# Altium PCB Copy of PCB1.PcbDoc (part 2 of 3)
Units mil, origin at the board's own origin, x right, y up, seen from the top; angles counter-clockwise.
Board outline 2060 x 2060 mil, 4 copper layers (L1, L2, L3, L4), stack 61.583 mil thick; 50 components, 94 nets, 313 pads, 31 vias.
Unrouted connection lines stored in the file: 190.
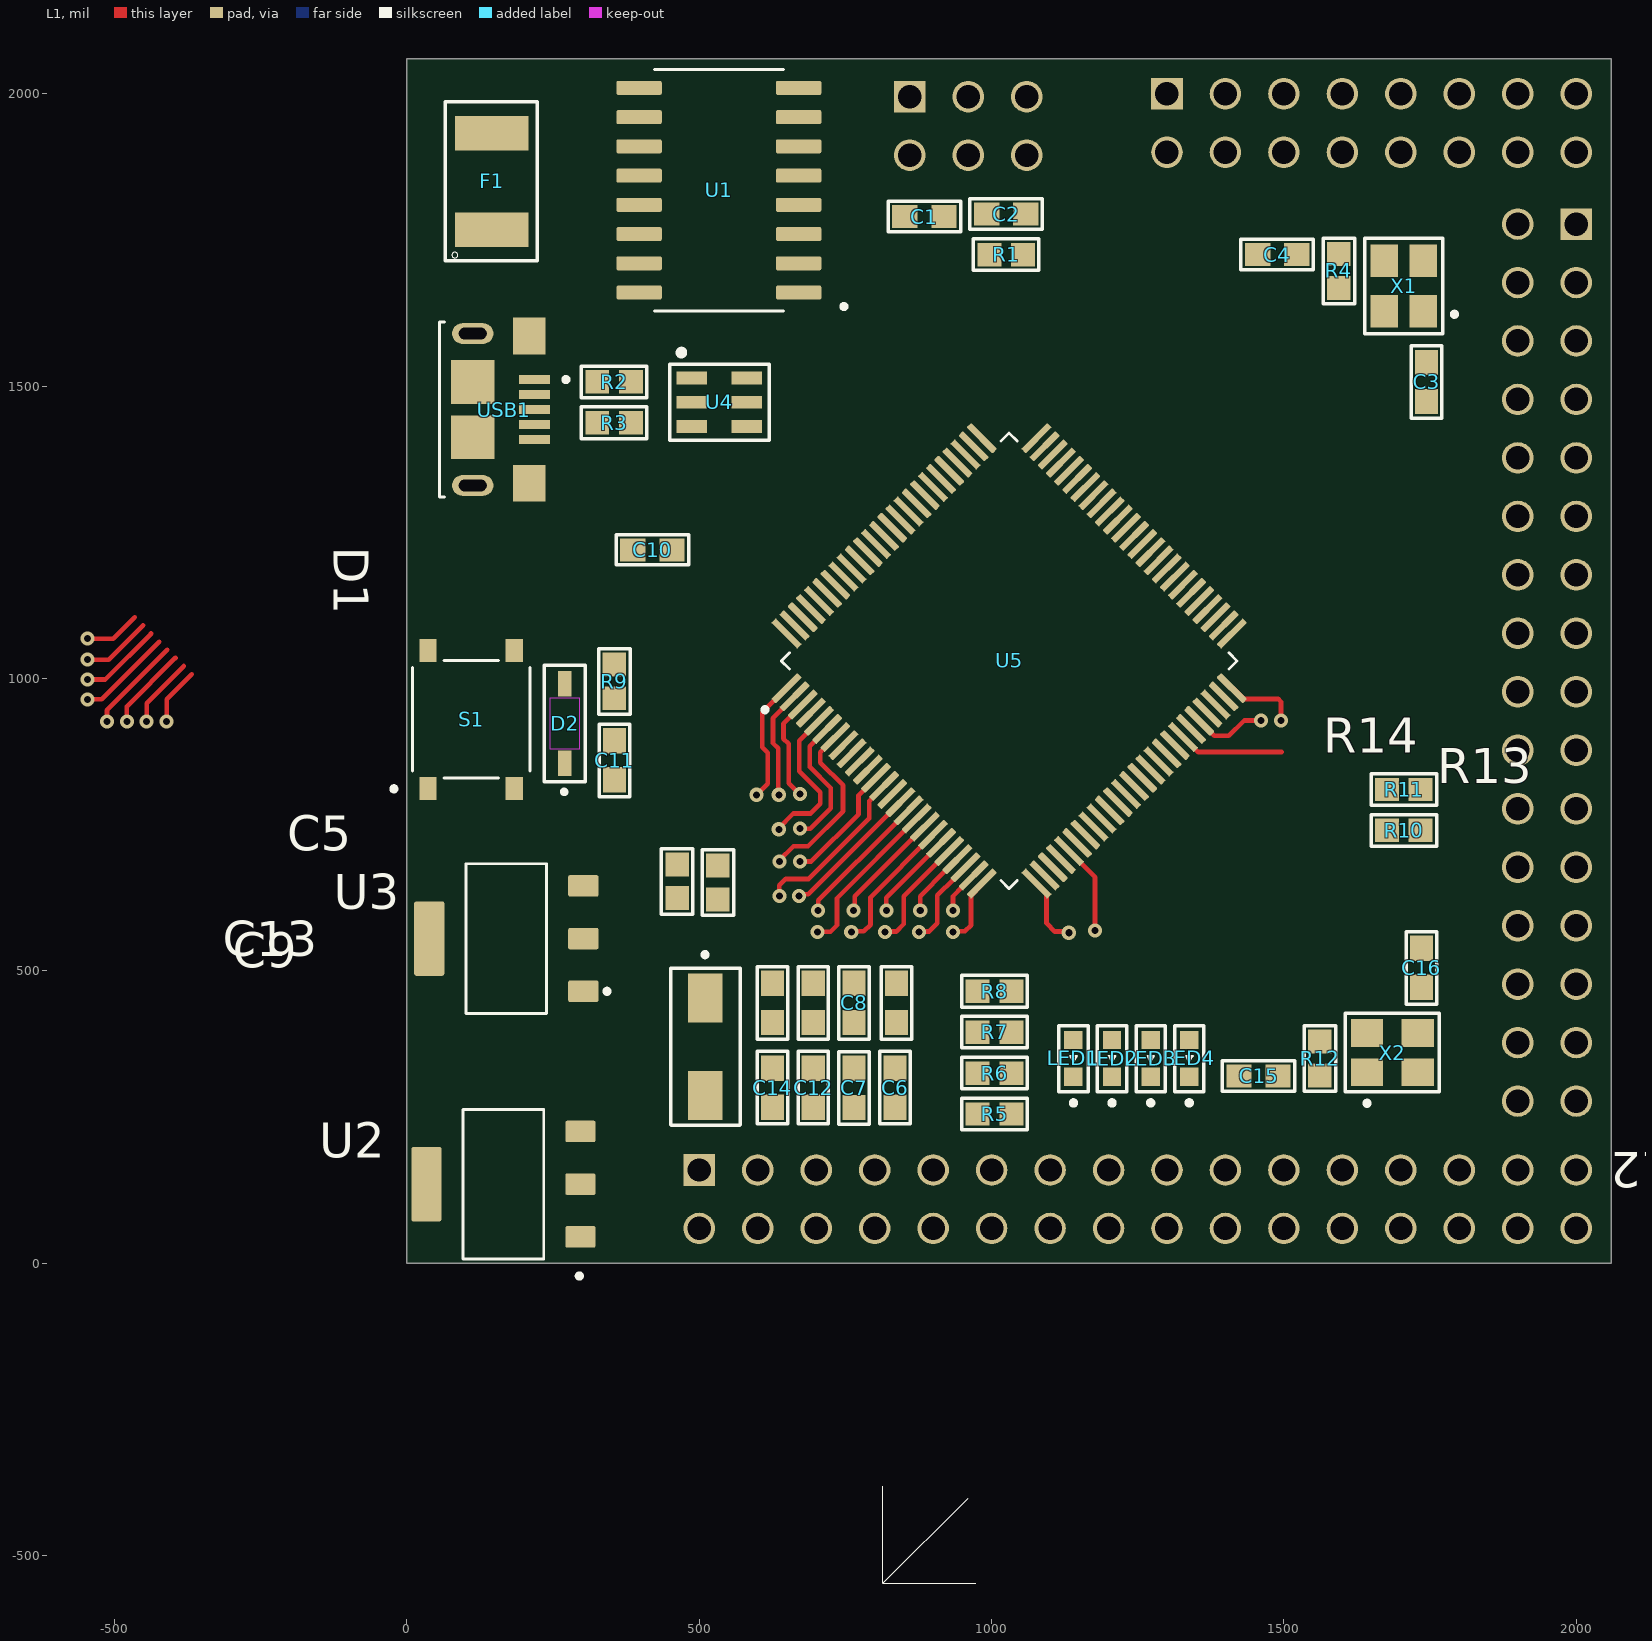
[diagram p0: L1 view]

## Part data (continued)
H1 H2: library part TSW-116-07-G-D, "Connector Header Through Hole 32 position 0.100\" (2.54mm)", Color=Black, Manufacturer=Samtec, Manufacturer Lifecycle Status=PRODUCTION, Max Current Rating=7.6A, Max Operating Temperature=125°C, Max Voltage Rating (AC)=550V, Min Operating Temperature=-55°C, Supplier Part Number=612-TSW-116-07-G-D-ND, Category="Power Connectors", ComponentLink1Description=https://datasheet.octopart.com:443/TSW-116-07-G-D-Samtec-datasheet-97325576.pdf?src-supplier=Sager+Electronics, ComponentLink1URL=https://datasheet.octopart.com:443/TSW-116-07-G-D-Samtec-datasheet-97325576.pdf?src-supplier=Sager+Electronics, ComponentLink2Description=https://datasheet.octopart.com:443/TSW-116-07-G-D-Samtec-datasheet-151455181.pdf?src-supplier=Sager+Electronics, ComponentLink2URL=https://datasheet.octopart.com:443/TSW-116-07-G-D-Samtec-datasheet-151455181.pdf?src-supplier=Sager+Electronics, ComponentLink3Description=https://sigma.octopart.com:443/97325577/technical_drawing/Samtec-TSW-116-07-G-D.pdf?src-supplier=Samtec, ComponentLink3URL=https://sigma.octopart.com:443/97325577/technical_drawing/Samtec-TSW-116-07-G-D.pdf?src-supplier=Samtec, ComponentLink4Description=https://datasheet.octopart.com:443/TSW-116-07-G-D-Samtec-datasheet-136646178.pdf?src-supplier=Master+Electronics, ComponentLink4URL=https://datasheet.octopart.com:443/TSW-116-07-G-D-Samtec-datasheet-136646178.pdf?src-supplier=Master+Electronics, ComponentLink5Description=https://datasheet.octopart.com:443/TSW-116-07-G-D-Samtec-datasheet-118235302.pdf?src-supplier=Electro+Sonic, ComponentLink5URL=https://datasheet.octopart.com:443/TSW-116-07-G-D-Samtec-datasheet-118235302.pdf?src-supplier=Electro+Sonic, ComponentLink6Description=https://datasheet.octopart.com:443/TSW-116-07-G-D-Samtec-datasheet-182948906.pdf?src-supplier=JRH+Electronics, ComponentLink6URL=https://datasheet.octopart.com:443/TSW-116-07-G-D-Samtec-datasheet-182948906.pdf?src-supplier=JRH+Electronics, ComponentLink7Description=https://datasheet.octopart.com:443/TSW-116-07-G-D-Samtec-datasheet-160657603.pdf?src-supplier=Toby+Electronics, ComponentLink7URL=https://datasheet.octopart.com:443/TSW-116-07-G-D-Samtec-datasheet-160657603.pdf?src-supplier=Toby+Electronics, ComponentLink8Description=https://datasheet.octopart.com:443/TSW-116-07-G-D-Samtec-datasheet-116539033.pdf?src-supplier=Toby+Electronics, ComponentLink8URL=https://datasheet.octopart.com:443/TSW-116-07-G-D-Samtec-datasheet-116539033.pdf?src-supplier=Toby+Electronics, ComponentLink9Description=https://datasheet.octopart.com:443/TSW-116-07-G-D-Samtec-datasheet-116536310.pdf?src-supplier=Toby+Electronics, ComponentLink9URL=https://datasheet.octopart.com:443/TSW-116-07-G-D-Samtec-datasheet-116536310.pdf?src-supplier=Toby+Electronics, ComponentLink10Description=https://datasheet.octopart.com:443/TSW-116-07-G-D-.-Samtec-datasheet-138830914.pdf?src-supplier=Newark, ComponentLink10URL=https://datasheet.octopart.com:443/TSW-116-07-G-D-.-Samtec-datasheet-138830914.pdf?src-supplier=Newark, ComponentLink11Description=https://datasheet.octopart.com:443/TSW-116-07-G-D-Samtec-datasheet-112220187.pdf?src-supplier=Newark, ComponentLink11URL=https://datasheet.octopart.com:443/TSW-116-07-G-D-Samtec-datasheet-112220187.pdf?src-supplier=Newark, ComponentLink12Description=https://datasheet.octopart.com:443/TSW-116-07-G-D-Samtec-datasheet-11047283.pdf?src-supplier=Newark, ComponentLink12URL=https://datasheet.octopart.com:443/TSW-116-07-G-D-Samtec-datasheet-11047283.pdf?src-supplier=Newark, ComponentLink13Description=https://datasheet.octopart.com/TSW-116-07-G-D-Samtec-datasheet-86818365.pdf, ComponentLink13URL=https://datasheet.octopart.com/TSW-116-07-G-D-Samtec-datasheet-86818365.pdf, ComponentLink14Description=https://datasheet.octopart.com:443/TSW-116-07-G-D-Samtec-datasheet-11542832.pdf?src-supplier=Arrow+Electronics, ComponentLink14URL=https://datasheet.octopart.com:443/TSW-116-07-G-D-Samtec-datasheet-11542832.pdf?src-supplier=Arrow+Electronics, Connector Type="Male Pin", Contact Material=Bronze, Contact Mating Length=5.842mm, Contact Plating=Gold, Depth=5.08mm, Gender=Male, Housing Color=Black, Housing Material=Polyester, Lead Free="Lead Free", Lead Pitch=2.54mm, Length=40.64mm, Lifecycle Status=Production, Manufacturer Part Number=TSW-116-07-G-D, Mounting Technology="Through Hole", Number of Contacts=32, Number of Positions=32, Number of Rows=2, Orientation=Straight, Pitch=2.54mm, Pricing="1=3.91, 10=3.318, 100=2.82, 500=2.51726, 1000=2.3972 (USD)", Radiation Hardening=No, REACH SVHC=Unaffected, RoHS=Compliant, Row Spacing=2.54mm, Stock=463, Supplier=DigiKey, Termination=Solder, Width=5.08mm
H3: library part TSW-108-07-G-D, "Connector Header Through Hole 16 position 0.100\" (2.54mm)", Color=Black, Manufacturer=Samtec, Manufacturer Lifecycle Status=PRODUCTION, Max Current Rating=7.6A, Max Operating Temperature=125°C, Max Voltage Rating (AC)=550V, Min Operating Temperature=-55°C, Supplier Part Number=612-TSW-108-07-G-D-ND, Category="Headers and Wire Housings", ComponentLink1Description=https://datasheet.octopart.com:443/TSW-108-07-G-D-Samtec-datasheet-97325576.pdf?src-supplier=Sager+Electronics, ComponentLink1URL=https://datasheet.octopart.com:443/TSW-108-07-G-D-Samtec-datasheet-97325576.pdf?src-supplier=Sager+Electronics, ComponentLink2Description=https://datasheet.octopart.com:443/TSW-108-07-G-D-Samtec-datasheet-151455181.pdf?src-supplier=Sager+Electronics, ComponentLink2URL=https://datasheet.octopart.com:443/TSW-108-07-G-D-Samtec-datasheet-151455181.pdf?src-supplier=Sager+Electronics, ComponentLink3Description=https://sigma.octopart.com:443/97325577/technical_drawing/Samtec-TSW-108-07-G-D.pdf?src-supplier=Samtec, ComponentLink3URL=https://sigma.octopart.com:443/97325577/technical_drawing/Samtec-TSW-108-07-G-D.pdf?src-supplier=Samtec, ComponentLink4Description=https://datasheet.octopart.com:443/TSW-108-07-G-D-Samtec-datasheet-63880566.pdf?src-supplier=Newark, ComponentLink4URL=https://datasheet.octopart.com:443/TSW-108-07-G-D-Samtec-datasheet-63880566.pdf?src-supplier=Newark, ComponentLink5Description=https://datasheet.octopart.com:443/TSW-108-07-G-D-Samtec-datasheet-11047283.pdf?src-supplier=Newark, ComponentLink5URL=https://datasheet.octopart.com:443/TSW-108-07-G-D-Samtec-datasheet-11047283.pdf?src-supplier=Newark, ComponentLink6Description=https://datasheet.octopart.com:443/TSW-108-07-G-D-Samtec-datasheet-136646178.pdf?src-supplier=Master+Electronics, ComponentLink6URL=https://datasheet.octopart.com:443/TSW-108-07-G-D-Samtec-datasheet-136646178.pdf?src-supplier=Master+Electronics, ComponentLink7Description=https://datasheet.octopart.com:443/TSW-108-07-G-D-Samtec-datasheet-116615235.pdf?src-supplier=Master+Electronics, ComponentLink7URL=https://datasheet.octopart.com:443/TSW-108-07-G-D-Samtec-datasheet-116615235.pdf?src-supplier=Master+Electronics, ComponentLink8Description=https://datasheet.octopart.com:443/TSW-108-07-G-D-Samtec-datasheet-62107121.pdf?src-supplier=Farnell, ComponentLink8URL=https://datasheet.octopart.com:443/TSW-108-07-G-D-Samtec-datasheet-62107121.pdf?src-supplier=Farnell, ComponentLink9Description=https://datasheet.octopart.com:443/TSW-108-07-G-D-Samtec-datasheet-182948906.pdf?src-supplier=JRH+Electronics, ComponentLink9URL=https://datasheet.octopart.com:443/TSW-108-07-G-D-Samtec-datasheet-182948906.pdf?src-supplier=JRH+Electronics, ComponentLink10Description=https://datasheet.octopart.com:443/TSW-108-07-G-D-Samtec-datasheet-160657603.pdf?src-supplier=Toby+Electronics, ComponentLink10URL=https://datasheet.octopart.com:443/TSW-108-07-G-D-Samtec-datasheet-160657603.pdf?src-supplier=Toby+Electronics, ComponentLink11Description=https://datasheet.octopart.com:443/TSW-108-07-G-D-Samtec-datasheet-116539033.pdf?src-supplier=Toby+Electronics, ComponentLink11URL=https://datasheet.octopart.com:443/TSW-108-07-G-D-Samtec-datasheet-116539033.pdf?src-supplier=Toby+Electronics, ComponentLink12Description=https://datasheet.octopart.com:443/TSW-108-07-G-D-Samtec-datasheet-116536310.pdf?src-supplier=Toby+Electronics, ComponentLink12URL=https://datasheet.octopart.com:443/TSW-108-07-G-D-Samtec-datasheet-116536310.pdf?src-supplier=Toby+Electronics, ComponentLink13Description=https://datasheet.octopart.com/TSW-108-07-G-D-Samtec-datasheet-86818365.pdf, ComponentLink13URL=https://datasheet.octopart.com/TSW-108-07-G-D-Samtec-datasheet-86818365.pdf, ComponentLink14Description=https://datasheet.octopart.com:443/TSW-108-07-G-D-Samtec-datasheet-5313500.pdf?src-supplier=_legacy+Avnet, ComponentLink14URL=https://datasheet.octopart.com:443/TSW-108-07-G-D-Samtec-datasheet-5313500.pdf?src-supplier=_legacy+Avnet, Connector Type="Male Pin", Contact Material=Bronze, Contact Mating Length=5.842mm, Contact Plating=Gold, Depth=5.08mm, Gender=Male, Housing Color=Black, Housing Material=Polyester, Lead Free="Lead Free", Lead Pitch=2.54mm, Lifecycle Status=Production, Manufacturer Part Number=TSW-108-07-G-D, Mounting Technology="Through Hole", Number of Contacts=16, Number of Positions=16, Number of Rows=2, Orientation=Straight, Packaging=Bulk, Pins=16, Pitch=2.54mm, Pricing="1=1.34, 10=1.135, 100=0.9644, 500=0.8608, 1000=0.8197, 5000=0.73175, 10000=0.7275 (USD)", Radiation Hardening=No, REACH SVHC=Unaffected, RoHS=Compliant, Row Spacing=2.54mm, Stock=1851, Supplier=DigiKey, Termination=Solder, Width=5.08mm
H4: library part TSW-103-07-G-D, "CONN HEADER VERT 6POS 2.54MM", Color=Black, Manufacturer=Samtec, Manufacturer Lifecycle Status=PRODUCTION, Max Current Rating=7.6A, Max Operating Temperature=125°C, Max Voltage Rating (AC)=550V, Min Operating Temperature=-55°C, Supplier Part Number=612-TSW-103-07-G-D-ND, Category="Headers and Wire Housings", ComponentLink1Description=https://datasheet.octopart.com:443/TSW-103-07-G-D-Samtec-datasheet-97325576.pdf?src-supplier=Newark, ComponentLink1URL=https://datasheet.octopart.com:443/TSW-103-07-G-D-Samtec-datasheet-97325576.pdf?src-supplier=Newark, ComponentLink2Description=https://sigma.octopart.com:443/97325577/technical_drawing/Samtec-TSW-103-07-G-D.pdf?src-supplier=HQonline, ComponentLink2URL=https://sigma.octopart.com:443/97325577/technical_drawing/Samtec-TSW-103-07-G-D.pdf?src-supplier=HQonline, ComponentLink3Description=https://datasheet.octopart.com:443/TSW-103-07-G-D-Samtec-datasheet-62107121.pdf?src-supplier=Farnell, ComponentLink3URL=https://datasheet.octopart.com:443/TSW-103-07-G-D-Samtec-datasheet-62107121.pdf?src-supplier=Farnell, ComponentLink4Description=https://datasheet.octopart.com:443/TSW-103-07-G-D-Samtec-datasheet-150856372.pdf?src-supplier=Electro+Sonic, ComponentLink4URL=https://datasheet.octopart.com:443/TSW-103-07-G-D-Samtec-datasheet-150856372.pdf?src-supplier=Electro+Sonic, ComponentLink5Description=https://datasheet.octopart.com:443/TSW-103-07-G-D-Samtec-datasheet-116615235.pdf?src-supplier=Electro+Sonic, ComponentLink5URL=https://datasheet.octopart.com:443/TSW-103-07-G-D-Samtec-datasheet-116615235.pdf?src-supplier=Electro+Sonic, ComponentLink6Description=https://datasheet.octopart.com:443/TSW-103-07-G-D-Samtec-datasheet-11047283.pdf?src-supplier=element14+APAC, ComponentLink6URL=https://datasheet.octopart.com:443/TSW-103-07-G-D-Samtec-datasheet-11047283.pdf?src-supplier=element14+APAC, ComponentLink7Description=https://datasheet.octopart.com:443/TSW-103-07-G-D-Samtec-datasheet-182948906.pdf?src-supplier=JRH+Electronics, ComponentLink7URL=https://datasheet.octopart.com:443/TSW-103-07-G-D-Samtec-datasheet-182948906.pdf?src-supplier=JRH+Electronics, ComponentLink8Description=https://datasheet.octopart.com:443/TSW-103-07-G-D-Samtec-datasheet-160657603.pdf?src-supplier=Toby+Electronics, ComponentLink8URL=https://datasheet.octopart.com:443/TSW-103-07-G-D-Samtec-datasheet-160657603.pdf?src-supplier=Toby+Electronics, ComponentLink9Description=https://datasheet.octopart.com:443/TSW-103-07-G-D-Samtec-datasheet-116539033.pdf?src-supplier=Toby+Electronics, ComponentLink9URL=https://datasheet.octopart.com:443/TSW-103-07-G-D-Samtec-datasheet-116539033.pdf?src-supplier=Toby+Electronics, ComponentLink10Description=https://datasheet.octopart.com:443/TSW-103-07-G-D-Samtec-datasheet-116536310.pdf?src-supplier=Toby+Electronics, ComponentLink10URL=https://datasheet.octopart.com:443/TSW-103-07-G-D-Samtec-datasheet-116536310.pdf?src-supplier=Toby+Electronics, ComponentLink11Description=https://datasheet.octopart.com:443/TSW-103-07-G-D-Samtec-datasheet-151455181.pdf?src-supplier=Sager+Electronics, ComponentLink11URL=https://datasheet.octopart.com:443/TSW-103-07-G-D-Samtec-datasheet-151455181.pdf?src-supplier=Sager+Electronics, ComponentLink12Description=https://datasheet.octopart.com/TSW-103-07-G-D-Samtec-datasheet-86818365.pdf, ComponentLink12URL=https://datasheet.octopart.com/TSW-103-07-G-D-Samtec-datasheet-86818365.pdf, ComponentLink13Description=https://datasheet.octopart.com:443/TSW-103-07-G-D-Samtec-datasheet-5313500.pdf?src-supplier=_legacy+Avnet, ComponentLink13URL=https://datasheet.octopart.com:443/TSW-103-07-G-D-Samtec-datasheet-5313500.pdf?src-supplier=_legacy+Avnet, Connector Type="Male Pin", Contact Material=Bronze, Contact Mating Length=5.842mm, Contact Plating=Gold, Depth=5.08mm, Gender=Male, Housing Color=Black, Housing Material=Polyester, Lead Free="Lead Free", Lead Pitch=2.54mm, Lifecycle Status=Production, Manufacturer Part Number=TSW-103-07-G-D, Mounting Technology="Through Hole", Number of Contacts=6, Number of Positions=6, Number of Rows=2, Orientation=Straight, Packaging=Bulk, Pins=6, Pitch=2.54mm, Pricing="1=0.58, 10=0.495, 100=0.4209, 500=0.37568, 1000=0.35773, 5000=0.31932, 10000=0.30409 (USD)", Radiation Hardening=No, REACH SVHC=Unaffected, RoHS=Compliant, Row Spacing=2.54mm, Stock=10228, Supplier=DigiKey, Termination=Solder, Width=5.08mm
LED1: library part 150060VS75000, "LED GREEN CLEAR 0603 SMD", Case Code (Imperial)=0603, Case Code (Metric)=1608, Color=Green, Forward Current=100mA, Forward Voltage=2V, Manufacturer="Wurth Elektronik", Manufacturer Lifecycle Status=ACTIVE, Max Junction Temperature (Tj)=95°C, Max Operating Temperature=85°C, Max Reverse Voltage (DC)=5V, Min Operating Temperature=-40°C, Power Dissipation=72mW, Supplier Part Number=732-4980-1-ND, Test Current=20mA, Case/Package=0603, Category=LEDs, ComponentLink1Description=https://datasheet.octopart.com:443/150060VS75000-W%C3%BCrth-Elektronik-datasheet-141404641.pdf?src-supplier=Upverter, ComponentLink1URL=https://datasheet.octopart.com:443/150060VS75000-W%C3%BCrth-Elektronik-datasheet-141404641.pdf?src-supplier=Upverter, ComponentLink2Description=https://datasheet.octopart.com:443/150060VS75000-W%C3%BCrth-Elektronik-datasheet-15983789.pdf?src-supplier=Upverter, ComponentLink2URL=https://datasheet.octopart.com:443/150060VS75000-W%C3%BCrth-Elektronik-datasheet-15983789.pdf?src-supplier=Upverter, ComponentLink3Description=https://datasheet.octopart.com:443/150060VS75000-W%C3%BCrth-Elektronik-datasheet-141916710.pdf?src-supplier=Newark, ComponentLink3URL=https://datasheet.octopart.com:443/150060VS75000-W%C3%BCrth-Elektronik-datasheet-141916710.pdf?src-supplier=Newark, ComponentLink4Description=https://datasheet.octopart.com:443/150060VS75000-W%C3%BCrth-Elektronik-datasheet-41196440.pdf?src-supplier=Newark, ComponentLink4URL=https://datasheet.octopart.com:443/150060VS75000-W%C3%BCrth-Elektronik-datasheet-41196440.pdf?src-supplier=Newark, Dominant Wavelength=570nm, Height=700µm, Length=1.6mm, Lens Style="Clear, Rectangular", Lifecycle Status=Production, Luminous Intensity=40mcd, Manufacturer Part Number=150060VS75000, Mounting Technology="Surface Mount", Packaging="Tape and Reel", Peak Wavelength=572nm, Pins=2, Pricing="1=0.15, 50=0.142, 100=0.1239 (USD)", REACH SVHC=Unknown, Reverse Voltage=5V, RoHS=Compliant, Stock=627050, Supplier=DigiKey, Viewing Angle=140°, Wavelength=570nm, Width=800µm, YEOL="1 = Estimated lifetime > 10 years"
LED2: library part 150060YS75000, "LED YELLOW CLEAR 0603 SMD", Case Code (Imperial)=0603, Case Code (Metric)=1608, Color=Yellow, Forward Current=100mA, Forward Voltage=2V, Manufacturer="Wurth Elektronik", Manufacturer Lifecycle Status=ACTIVE, Max Junction Temperature (Tj)=95°C, Max Operating Temperature=85°C, Max Reverse Voltage (DC)=5V, Min Operating Temperature=-40°C, Power Dissipation=72mW, Supplier Part Number=732-4981-1-ND, Test Current=20mA, Case/Package=0603, Category=LEDs, ComponentLink1Description=https://datasheet.octopart.com:443/150060YS75000-W%C3%BCrth-Elektronik-datasheet-140603452.pdf?src-supplier=Newark, ComponentLink1URL=https://datasheet.octopart.com:443/150060YS75000-W%C3%BCrth-Elektronik-datasheet-140603452.pdf?src-supplier=Newark, ComponentLink2Description=https://datasheet.octopart.com:443/150060YS75000-W%C3%BCrth-Elektronik-datasheet-41196441.pdf?src-supplier=Newark, ComponentLink2URL=https://datasheet.octopart.com:443/150060YS75000-W%C3%BCrth-Elektronik-datasheet-41196441.pdf?src-supplier=Newark, ComponentLink3Description=https://datasheet.octopart.com:443/150060YS75000-W%C3%BCrth-Elektronik-datasheet-15976795.pdf?src-supplier=Upverter, ComponentLink3URL=https://datasheet.octopart.com:443/150060YS75000-W%C3%BCrth-Elektronik-datasheet-15976795.pdf?src-supplier=Upverter, Dominant Wavelength=590nm, Height=700µm, Length=1.6mm, Lens Style="Clear, Rectangular", Lifecycle Status=Production, Luminous Intensity=120mcd, Manufacturer Part Number=150060YS75000, Mounting Technology="Surface Mount", Packaging="Tape and Reel", Peak Wavelength=595nm, Pricing="1=0.15, 50=0.142, 100=0.1239 (USD)", REACH SVHC=Unknown, Reverse Voltage=5V, RoHS=Compliant, Stock=129880, Supplier=DigiKey, Viewing Angle=140°, Wavelength=590nm, Width=800µm, YEOL="1 = Estimated lifetime > 10 years"
LED3: library part 150060RS75000, "LED RED CLEAR 0603 SMD", Case Code (Imperial)=0603, Case Code (Metric)=1608, Color=Red, Forward Current=100mA, Forward Voltage=2V, Manufacturer="Wurth Elektronik", Manufacturer Lifecycle Status=ACTIVE, Max Junction Temperature (Tj)=95°C, Max Operating Temperature=85°C, Max Reverse Voltage (DC)=5V, Min Operating Temperature=-40°C, Power Dissipation=72mW, Supplier Part Number=732-4978-6-ND, Test Current=20mA, Case/Package=0603, Category=LEDs, ComponentLink1Description=https://datasheet.octopart.com:443/150060RS75000-W%C3%BCrth-Elektronik-datasheet-141913886.pdf?src-supplier=Upverter, ComponentLink1URL=https://datasheet.octopart.com:443/150060RS75000-W%C3%BCrth-Elektronik-datasheet-141913886.pdf?src-supplier=Upverter, ComponentLink2Description=https://datasheet.octopart.com:443/150060RS75000-W%C3%BCrth-Elektronik-datasheet-15983787.pdf?src-supplier=Upverter, ComponentLink2URL=https://datasheet.octopart.com:443/150060RS75000-W%C3%BCrth-Elektronik-datasheet-15983787.pdf?src-supplier=Upverter, ComponentLink3Description=https://datasheet.octopart.com:443/150060RS75000-W%C3%BCrth-Elektronik-datasheet-140603451.pdf?src-supplier=Wurth+Elektronik, ComponentLink3URL=https://datasheet.octopart.com:443/150060RS75000-W%C3%BCrth-Elektronik-datasheet-140603451.pdf?src-supplier=Wurth+Elektronik, ComponentLink4Description=https://datasheet.octopart.com:443/150060RS75000-W%C3%BCrth-Elektronik-datasheet-41196438.pdf?src-supplier=Newark, ComponentLink4URL=https://datasheet.octopart.com:443/150060RS75000-W%C3%BCrth-Elektronik-datasheet-41196438.pdf?src-supplier=Newark, Dominant Wavelength=625nm, Height=700µm, Length=1.6mm, Lens Style="Clear, Rectangular", Lifecycle Status=Production, Luminous Intensity=250mcd, Manufacturer Part Number=150060RS75000, Mounting Technology="Surface Mount", Packaging="Tape and Reel", Peak Wavelength=630nm, Pricing="1=0.15, 50=0.142, 100=0.1239 (USD)", REACH SVHC=Unknown, Reverse Voltage=5V, RoHS=Compliant, Stock=386931, Supplier=DigiKey, Viewing Angle=140°, Wavelength=625nm, Width=800µm, YEOL="1 = Estimated lifetime > 10 years"
LED4: library part 150060BS75000, "LED BLUE CLEAR 0603 SMD", Case Code (Imperial)=0603, Case Code (Metric)=1608, Color=Blue, Forward Current=100mA, Forward Voltage=3.2V, Manufacturer="Wurth Elektronik", Manufacturer Lifecycle Status=ACTIVE, Max Junction Temperature (Tj)=95°C, Max Operating Temperature=85°C, Max Reverse Voltage (DC)=5V, Min Operating Temperature=-40°C, Power Dissipation=105mW, Supplier Part Number=732-4966-6-ND, Test Current=20mA, Case/Package=0603, Category=LEDs, ComponentLink1Description=https://datasheet.octopart.com:443/150060BS75000-W%C3%BCrth-Elektronik-datasheet-140583947.pdf?src-supplier=Newark, ComponentLink1URL=https://datasheet.octopart.com:443/150060BS75000-W%C3%BCrth-Elektronik-datasheet-140583947.pdf?src-supplier=Newark, ComponentLink2Description=https://datasheet.octopart.com:443/150060BS75000-W%C3%BCrth-Elektronik-datasheet-41196436.pdf?src-supplier=Newark, ComponentLink2URL=https://datasheet.octopart.com:443/150060BS75000-W%C3%BCrth-Elektronik-datasheet-41196436.pdf?src-supplier=Newark, ComponentLink3Description=https://datasheet.octopart.com:443/150060BS75000-W%C3%BCrth-Elektronik-datasheet-15983786.pdf?src-supplier=Upverter, ComponentLink3URL=https://datasheet.octopart.com:443/150060BS75000-W%C3%BCrth-Elektronik-datasheet-15983786.pdf?src-supplier=Upverter, Dominant Wavelength=470nm, Height=700µm, Length=1.6mm, Lens Style="Clear, Rectangular", Lifecycle Status=Production, Luminous Intensity=145mcd, Manufacturer Part Number=150060BS75000, Mounting Technology="Surface Mount", Packaging="Tape and Reel", Peak Wavelength=465nm, Pricing="1=0.16, 50=0.155, 100=0.1346 (USD)", REACH SVHC=Unknown, Reverse Voltage=5V, RoHS=Compliant, Stock=157758, Supplier=DigiKey, Viewing Angle=140°, Wavelength=470nm, Width=800µm, YEOL="1 = Estimated lifetime > 10 years"
R1 R9 R10 R11: library part RC0603FR-0710KL, "RES 10K OHM 1% 1/10W 0603", Case Code (Imperial)=0603, Manufacturer 1="Yageo Group", Max Operating Temperature=155°C, Min Operating Temperature=-55°C, Power Rating=100mW, Supplier Part Number 1=311-10.0KHRDKR-ND, Temperature Coefficient=100ppm/°C, Tolerance=1%, Voltage Rating=75V, Voltage Rating (DC)=50V, Case Code (Metric)=0603, Case/Package=0603, China RoHS=Non-Compliant, ComponentLink1Description=https://datasheet.octopart.com:443/RC0603FR-0710KL-Yageo-datasheet-175887523.pdf?src-supplier=IHS, ComponentLink1URL=https://datasheet.octopart.com:443/RC0603FR-0710KL-Yageo-datasheet-175887523.pdf?src-supplier=IHS, ComponentLink2Description=https://datasheet.octopart.com:443/RC0603FR-0710KL-Yageo-datasheet-103092701.pdf?src-supplier=Upverter, ComponentLink2URL=https://datasheet.octopart.com:443/RC0603FR-0710KL-Yageo-datasheet-103092701.pdf?src-supplier=Upverter, ComponentLink3Description=https://datasheet.octopart.com:443/RC0603FR-0710KL-Yageo-datasheet-98239111.pdf?src-supplier=Upverter, ComponentLink3URL=https://datasheet.octopart.com:443/RC0603FR-0710KL-Yageo-datasheet-98239111.pdf?src-supplier=Upverter, ComponentLink4Description=https://datasheet.octopart.com:443/RC0603FR-0710KL-Yageo-datasheet-141265859.pdf?src-supplier=Upverter, ComponentLink4URL=https://datasheet.octopart.com:443/RC0603FR-0710KL-Yageo-datasheet-141265859.pdf?src-supplier=Upverter, ComponentLink5Description=https://sigma.octopart.com:443/138820526/technical_drawing/Yageo-RC0603FR-0710KL.pdf?src-supplier=Upverter, ComponentLink5URL=https://sigma.octopart.com:443/138820526/technical_drawing/Yageo-RC0603FR-0710KL.pdf?src-supplier=Upverter, ComponentLink6Description=https://datasheet.octopart.com:443/RC0603FR-0710KL-Yageo-datasheet-8328172.pdf?src-supplier=Farnell, ComponentLink6URL=https://datasheet.octopart.com:443/RC0603FR-0710KL-Yageo-datasheet-8328172.pdf?src-supplier=Farnell, ComponentLink7Description=https://datasheet.octopart.com:443/RC0603FR-0710KL-Yageo-datasheet-13691069.pdf?src-supplier=Farnell, ComponentLink7URL=https://datasheet.octopart.com:443/RC0603FR-0710KL-Yageo-datasheet-13691069.pdf?src-supplier=Farnell, ComponentLink8Description=https://datasheet.octopart.com:443/RC0603FR-0710KL-Yageo-datasheet-62067350.pdf?src-supplier=element14+APAC, ComponentLink8URL=https://datasheet.octopart.com:443/RC0603FR-0710KL-Yageo-datasheet-62067350.pdf?src-supplier=element14+APAC, ComponentLink9Description=https://datasheet.octopart.com:443/RC0603FR-0710KL-Yageo-datasheet-17842380.pdf?src-supplier=element14+APAC, ComponentLink9URL=https://datasheet.octopart.com:443/RC0603FR-0710KL-Yageo-datasheet-17842380.pdf?src-supplier=element14+APAC, ComponentLink10Description=https://datasheet.octopart.com:443/RC0603FR-0710KL-Yageo-datasheet-15599030.pdf?src-supplier=Future+Electronics, ComponentLink10URL=https://datasheet.octopart.com:443/RC0603FR-0710KL-Yageo-datasheet-15599030.pdf?src-supplier=Future+Electronics, ComponentLink11Description=https://datasheet.octopart.com:443/RC0603FR-0710KL-Yageo-Group-datasheet-176638170.pdf?src-supplier=Future+Electronics, ComponentLink11URL=https://datasheet.octopart.com:443/RC0603FR-0710KL-Yageo-Group-datasheet-176638170.pdf?src-supplier=Future+Electronics, ComponentLink12Description=https://datasheet.octopart.com:443/RC0603FR-0710KL-Yageo-datasheet-164759695.pdf?src-supplier=Future+Electronics, ComponentLink12URL=https://datasheet.octopart.com:443/RC0603FR-0710KL-Yageo-datasheet-164759695.pdf?src-supplier=Future+Electronics, ComponentLink13Description=https://datasheet.octopart.com:443/RC0603FR-0710KL-Yageo-datasheet-127823281.pdf?src-supplier=Future+Electronics, ComponentLink13URL=https://datasheet.octopart.com:443/RC0603FR-0710KL-Yageo-datasheet-127823281.pdf?src-supplier=Future+Electronics, ComponentLink14Description=https://datasheet.octopart.com:443/RC0603FR-0710KL-Yageo-datasheet-137700087.pdf?src-supplier=Future+Electronics, ComponentLink14URL=https://datasheet.octopart.com:443/RC0603FR-0710KL-Yageo-datasheet-137700087.pdf?src-supplier=Future+Electronics, ComponentLink15Description=https://datasheet.octopart.com:443/RC0603FR-0710KL-Yageo-datasheet-27584510.pdf?src-supplier=Future+Electronics, ComponentLink15URL=https://datasheet.octopart.com:443/RC0603FR-0710KL-Yageo-datasheet-27584510.pdf?src-supplier=Future+Electronics, ComponentLink16Description=https://datasheet.octopart.com:443/RC0603FR-0710KL-Yageo-datasheet-8324193.pdf?src-supplier=Future+Electronics, ComponentLink16URL=https://datasheet.octopart.com:443/RC0603FR-0710KL-Yageo-datasheet-8324193.pdf?src-supplier=Future+Electronics, ComponentLink17Description=https://datasheet.octopart.com:443/RC0603FR-0710KL-Yageo-datasheet-12596169.pdf?src-supplier=Newark, ComponentLink17URL=https://datasheet.octopart.com:443/RC0603FR-0710KL-Yageo-datasheet-12596169.pdf?src-supplier=Newark, ComponentLink18Description=https://datasheet.octopart.com:443/RC0603FR-0710KL-Yageo-datasheet-503470.pdf?src-supplier=Newark, ComponentLink18URL=https://datasheet.octopart.com:443/RC0603FR-0710KL-Yageo-datasheet-503470.pdf?src-supplier=Newark, ComponentLink19Description=https://datasheet.octopart.com:443/RC0603FR-0710KL-Yageo-datasheet-34211833.pdf?src-supplier=Newark, ComponentLink19URL=https://datasheet.octopart.com:443/RC0603FR-0710KL-Yageo-datasheet-34211833.pdf?src-supplier=Newark, ComponentLink20Description=https://datasheet.octopart.com:443/RC0603FR-0710KL-Yageo-Group-datasheet-189192902.pdf?src-supplier=LCSC, ComponentLink20URL=https://datasheet.octopart.com:443/RC0603FR-0710KL-Yageo-Group-datasheet-189192902.pdf?src-supplier=LCSC, ComponentLink21Description=https://datasheet.octopart.com:443/RC0603FR-0710KL-Yageo-datasheet-79472498.pdf?src-supplier=Megastar, ComponentLink21URL=https://datasheet.octopart.com:443/RC0603FR-0710KL-Yageo-datasheet-79472498.pdf?src-supplier=Megastar, ComponentLink22Description=https://datasheet.octopart.com/RC0603FR-0710KL-Yageo-datasheet-73766026.pdf, ComponentLink22URL=https://datasheet.octopart.com/RC0603FR-0710KL-Yageo-datasheet-73766026.pdf, ComponentLink23Description=https://datasheet.octopart.com:443/RC0603FR-0710KL-Yageo-datasheet-118562.pdf?src-supplier=DigiKey, ComponentLink23URL=https://datasheet.octopart.com:443/RC0603FR-0710KL-Yageo-datasheet-118562.pdf?src-supplier=DigiKey, ComponentLink24Description=http://sigma.octopart.com:80/conflict_mineral_statement/Yageo-company-3.pdf?src-supplier=Compliance+Statements, ComponentLink24URL=http://sigma.octopart.com:80/conflict_mineral_statement/Yageo-company-3.pdf?src-supplier=Compliance+Statements, ComponentLink25Description=http://sigma.octopart.com:80/rohs_statement/Yageo-company-2.pdf?src-supplier=Compliance+Statements, ComponentLink25URL=http://sigma.octopart.com:80/rohs_statement/Yageo-company-2.pdf?src-supplier=Compliance+Statements, Composition="Thick Film", Contact Plating=Tin, Depth=800µm, Height=450µm, Lead Free="Lead Free", Lead Pitch=300µm, Length=1.6mm, Lifecycle Status=Production, Manufacturer Part Number 1=RC0603FR-0710KL, Military Standard=Not, Mounting Technology="Surface Mount", Number of Terminals=2, Packaging="Tape & Reel", Pins=2, Pricing 1="1=0.1, 10=0.025, 25=0.0188, 50=0.015, 100=0.0122, 250=0.0094, 500=0.00782, 1000=0.00661 (USD)", Radiation Hardening=No, REACH SVHC=Unaffected, RoHS=Compliant, Schedule B="8533210045, 8533210045|8533210045|8533210045|8533210045|8533210045|8533210045|8533210045|8533210045|8533210045|8533210045|8533210045|8533210045|8533210045|8533210045|8533210045|8533210045|8533210045|8533210045|8533210045|8533210045|8533210045|8533210045|8533210045|85", Stock 1=2515430, Supplier 1=DigiKey, Termination=SMD/SMT, Weight=2.012816mg, Width=800µm, Working Voltage=75V
R2 R3: library part RC0603FR-0722RL, "RES 22 OHM 1% 1/10W 0603", Case Code (Imperial)=0603, Manufacturer="Yageo Group", Max Operating Temperature=155°C, Max Output current=8A, Max Power Dissipation=100mW, Min Input Voltage=1.4V, Min Operating Temperature=-55°C, Supplier Part Number=311-22.0HRCT-ND, Temperature Coefficient=100ppm/°C, Tolerance=1%, Voltage Rating=75V, Voltage Rating (AC)=50V, Case Code (Metric)=0603, Case/Package=0603, Category="Chip SMD Resistors", China RoHS=Non-Compliant, ComponentLink1Description=https://datasheet.octopart.com:443/RC0603FR-0722RL-Yageo-datasheet-175887523.pdf?src-supplier=IHS, ComponentLink1URL=https://datasheet.octopart.com:443/RC0603FR-0722RL-Yageo-datasheet-175887523.pdf?src-supplier=IHS, ComponentLink2Description=https://datasheet.octopart.com:443/RC0603FR-0722RL-Yageo-datasheet-62067350.pdf?src-supplier=element14+APAC, ComponentLink2URL=https://datasheet.octopart.com:443/RC0603FR-0722RL-Yageo-datasheet-62067350.pdf?src-supplier=element14+APAC, ComponentLink3Description=https://datasheet.octopart.com:443/RC0603FR-0722RL-Yageo-datasheet-8328172.pdf?src-supplier=element14+APAC, ComponentLink3URL=https://datasheet.octopart.com:443/RC0603FR-0722RL-Yageo-datasheet-8328172.pdf?src-supplier=element14+APAC, ComponentLink4Description=https://datasheet.octopart.com:443/RC0603FR-0722RL-Yageo-datasheet-103092701.pdf?src-supplier=Upverter, ComponentLink4URL=https://datasheet.octopart.com:443/RC0603FR-0722RL-Yageo-datasheet-103092701.pdf?src-supplier=Upverter, ComponentLink5Description=https://datasheet.octopart.com:443/RC0603FR-0722RL-Yageo-datasheet-98239111.pdf?src-supplier=Upverter, ComponentLink5URL=https://datasheet.octopart.com:443/RC0603FR-0722RL-Yageo-datasheet-98239111.pdf?src-supplier=Upverter, ComponentLink6Description=https://datasheet.octopart.com:443/RC0603FR-0722RL-Yageo-Group-datasheet-190305687.pdf?src-supplier=Newark, ComponentLink6URL=https://datasheet.octopart.com:443/RC0603FR-0722RL-Yageo-Group-datasheet-190305687.pdf?src-supplier=Newark, ComponentLink7Description=https://datasheet.octopart.com:443/RC0603FR-0722RL-Yageo-datasheet-12596169.pdf?src-supplier=Newark, ComponentLink7URL=https://datasheet.octopart.com:443/RC0603FR-0722RL-Yageo-datasheet-12596169.pdf?src-supplier=Newark, ComponentLink8Description=https://datasheet.octopart.com:443/RC0603FR-0722RL-Yageo-datasheet-34211833.pdf?src-supplier=Newark, ComponentLink8URL=https://datasheet.octopart.com:443/RC0603FR-0722RL-Yageo-datasheet-34211833.pdf?src-supplier=Newark, ComponentLink9Description=https://datasheet.octopart.com:443/RC0603FR-0722RL-Yageo-Group-datasheet-189192902.pdf?src-supplier=LCSC, ComponentLink9URL=https://datasheet.octopart.com:443/RC0603FR-0722RL-Yageo-Group-datasheet-189192902.pdf?src-supplier=LCSC, ComponentLink10Description=https://datasheet.octopart.com:443/RC0603FR-0722RL-Yageo-Group-datasheet-176638170.pdf?src-supplier=Future+Electronics, ComponentLink10URL=https://datasheet.octopart.com:443/RC0603FR-0722RL-Yageo-Group-datasheet-176638170.pdf?src-supplier=Future+Electronics, ComponentLink11Description=https://datasheet.octopart.com:443/RC0603FR-0722RL-Yageo-datasheet-164759695.pdf?src-supplier=Future+Electronics, ComponentLink11URL=https://datasheet.octopart.com:443/RC0603FR-0722RL-Yageo-datasheet-164759695.pdf?src-supplier=Future+Electronics, ComponentLink12Description=https://datasheet.octopart.com:443/RC0603FR-0722RL-Yageo-datasheet-127823281.pdf?src-supplier=Future+Electronics, ComponentLink12URL=https://datasheet.octopart.com:443/RC0603FR-0722RL-Yageo-datasheet-127823281.pdf?src-supplier=Future+Electronics, ComponentLink13Description=https://datasheet.octopart.com:443/RC0603FR-0722RL-Yageo-datasheet-137700087.pdf?src-supplier=Future+Electronics, ComponentLink13URL=https://datasheet.octopart.com:443/RC0603FR-0722RL-Yageo-datasheet-137700087.pdf?src-supplier=Future+Electronics, ComponentLink14Description=https://datasheet.octopart.com:443/RC0603FR-0722RL-Yageo-datasheet-68297981.pdf?src-supplier=Future+Electronics, ComponentLink14URL=https://datasheet.octopart.com:443/RC0603FR-0722RL-Yageo-datasheet-68297981.pdf?src-supplier=Future+Electronics, ComponentLink15Description=https://datasheet.octopart.com:443/RC0603FR-0722RL-Yageo-datasheet-27584510.pdf?src-supplier=Future+Electronics, ComponentLink15URL=https://datasheet.octopart.com:443/RC0603FR-0722RL-Yageo-datasheet-27584510.pdf?src-supplier=Future+Electronics, ComponentLink16Description=https://datasheet.octopart.com:443/RC0603FR-0722RL-Yageo-datasheet-15599030.pdf?src-supplier=Future+Electronics, ComponentLink16URL=https://datasheet.octopart.com:443/RC0603FR-0722RL-Yageo-datasheet-15599030.pdf?src-supplier=Future+Electronics, ComponentLink17Description=https://datasheet.octopart.com:443/RC0603FR-0722RL-Yageo-datasheet-8324193.pdf?src-supplier=Future+Electronics, ComponentLink17URL=https://datasheet.octopart.com:443/RC0603FR-0722RL-Yageo-datasheet-8324193.pdf?src-supplier=Future+Electronics, ComponentLink18Description=https://datasheet.octopart.com:443/RC0603FR-0722RL-Yageo-datasheet-148775077.pdf?src-supplier=TME, ComponentLink18URL=https://datasheet.octopart.com:443/RC0603FR-0722RL-Yageo-datasheet-148775077.pdf?src-supplier=TME, ComponentLink19Description=https://datasheet.octopart.com/RC0603FR-0722RL-Yageo-datasheet-73766026.pdf, ComponentLink19URL=https://datasheet.octopart.com/RC0603FR-0722RL-Yageo-datasheet-73766026.pdf, ComponentLink20Description=https://datasheet.octopart.com:443/RC0603FR-0722RL-Yageo-datasheet-13691069.pdf?src-supplier=Farnell, ComponentLink20URL=https://datasheet.octopart.com:443/RC0603FR-0722RL-Yageo-datasheet-13691069.pdf?src-supplier=Farnell, ComponentLink21Description=https://datasheet.octopart.com:443/RC0603FR-0722RL-Yageo-datasheet-118562.pdf?src-supplier=DigiKey, ComponentLink21URL=https://datasheet.octopart.com:443/RC0603FR-0722RL-Yageo-datasheet-118562.pdf?src-supplier=DigiKey, ComponentLink22Description=http://sigma.octopart.com:80/conflict_mineral_statement/Yageo-company-3.pdf?src-supplier=Compliance+Statements, ComponentLink22URL=http://sigma.octopart.com:80/conflict_mineral_statement/Yageo-company-3.pdf?src-supplier=Compliance+Statements, ComponentLink23Description=http://sigma.octopart.com:80/rohs_statement/Yageo-company-2.pdf?src-supplier=Compliance+Statements, ComponentLink23URL=http://sigma.octopart.com:80/rohs_statement/Yageo-company-2.pdf?src-supplier=Compliance+Statements, Composition="Thick Film", Contact Plating=Tin, Country of Origin="Mainland China, Taiwan", Depth=800µm, Export Control Classification Number (ECCN) Code=EAR99, Features="Moisture Resistant", Harmonized Tariff Schedule (HTS) Code=8533.21.00.30, Height=450µm, Introduction Date=2004-09-22, Lead Free="Lead Free", Length=1.6mm, Lifecycle Status=Production, Manufacturer Part Number=RC0603FR-0722RL, Military Standard=Not, Mounting Technology="Surface Mount", Number of Terminals=2, Number of Terminations=2, Output Current=8A, Packaging=Rail/Tube, Pins=2, Power Rating=100mW, Pricing="1=0.1, 10=0.025, 25=0.0188, 50=0.015, 100=0.0122, 250=0.0094, 500=0.00782, 1000=0.00661 (USD)", Radiation Hardening=No, REACH SVHC=Unaffected, RoHS=Compliant, Schedule B="8533210045, 8533210045|8533210045|8533210045|8533210045|8533210045|8533210045|8533210045|8533210045|8533210045|8533210045|8533210045|8533210045|8533210045|8533210045|8533210045|8533210045|8533210045|8533210045|8533210045|8533210045|8533210045|8533210045|8533210045|85", Supplier=DigiKey, Termination=SMD/SMT, Voltage Rating (DC)=50V, Width=800µm, Working Voltage=75V
R4 R12: library part RC0603FR-071ML, "RES 1M OHM 1% 1/10W 0603", Case Code (Imperial)=0603, Manufacturer 1="Yageo Group", Max Operating Temperature=155°C, Min Operating Temperature=-55°C, Power Rating=100mW, Supplier Part Number 1=311-1.00MHRDKR-ND, Temperature Coefficient=100ppm/°C, Tolerance=1%, Voltage Rating=25V, Working Voltage=75V, Case Code (Metric)=0603, Case/Package=0603, China RoHS=Non-Compliant, ComponentLink1Description=https://datasheet.octopart.com:443/RC0603FR-071ML-Yageo-datasheet-175887523.pdf?src-supplier=Newark, ComponentLink1URL=https://datasheet.octopart.com:443/RC0603FR-071ML-Yageo-datasheet-175887523.pdf?src-supplier=Newark, ComponentLink2Description=https://datasheet.octopart.com:443/RC0603FR-071ML-Yageo-datasheet-34211833.pdf?src-supplier=Newark, ComponentLink2URL=https://datasheet.octopart.com:443/RC0603FR-071ML-Yageo-datasheet-34211833.pdf?src-supplier=Newark, ComponentLink3Description=https://datasheet.octopart.com:443/RC0603FR-071ML-Yageo-datasheet-8328172.pdf?src-supplier=element14+APAC, ComponentLink3URL=https://datasheet.octopart.com:443/RC0603FR-071ML-Yageo-datasheet-8328172.pdf?src-supplier=element14+APAC, ComponentLink4Description=https://datasheet.octopart.com:443/RC0603FR-071ML-Yageo-datasheet-17842380.pdf?src-supplier=element14+APAC, ComponentLink4URL=https://datasheet.octopart.com:443/RC0603FR-071ML-Yageo-datasheet-17842380.pdf?src-supplier=element14+APAC, ComponentLink5Description=https://datasheet.octopart.com:443/RC0603FR-071ML-Yageo-datasheet-62067350.pdf?src-supplier=Farnell, ComponentLink5URL=https://datasheet.octopart.com:443/RC0603FR-071ML-Yageo-datasheet-62067350.pdf?src-supplier=Farnell, ComponentLink6Description=https://datasheet.octopart.com:443/RC0603FR-071ML-Yageo-datasheet-13691069.pdf?src-supplier=Farnell, ComponentLink6URL=https://datasheet.octopart.com:443/RC0603FR-071ML-Yageo-datasheet-13691069.pdf?src-supplier=Farnell, ComponentLink7Description=https://datasheet.octopart.com:443/RC0603FR-071ML-Yageo-datasheet-103092701.pdf?src-supplier=Upverter, ComponentLink7URL=https://datasheet.octopart.com:443/RC0603FR-071ML-Yageo-datasheet-103092701.pdf?src-supplier=Upverter, ComponentLink8Description=https://datasheet.octopart.com:443/RC0603FR-071ML-Yageo-datasheet-79472498.pdf?src-supplier=Upverter, ComponentLink8URL=https://datasheet.octopart.com:443/RC0603FR-071ML-Yageo-datasheet-79472498.pdf?src-supplier=Upverter, ComponentLink9Description=https://datasheet.octopart.com:443/RC0603FR-071ML-Yageo-Group-datasheet-189192902.pdf?src-supplier=LCSC, ComponentLink9URL=https://datasheet.octopart.com:443/RC0603FR-071ML-Yageo-Group-datasheet-189192902.pdf?src-supplier=LCSC, ComponentLink10Description=https://datasheet.octopart.com:443/RC0603FR-071ML-Yageo-Group-datasheet-176638170.pdf?src-supplier=Future+Electronics, ComponentLink10URL=https://datasheet.octopart.com:443/RC0603FR-071ML-Yageo-Group-datasheet-176638170.pdf?src-supplier=Future+Electronics, ComponentLink11Description=https://datasheet.octopart.com:443/RC0603FR-071ML-Yageo-datasheet-164759695.pdf?src-supplier=Future+Electronics, ComponentLink11URL=https://datasheet.octopart.com:443/RC0603FR-071ML-Yageo-datasheet-164759695.pdf?src-supplier=Future+Electronics, ComponentLink12Description=https://datasheet.octopart.com:443/RC0603FR-071ML-Yageo-datasheet-137700087.pdf?src-supplier=Future+Electronics, ComponentLink12URL=https://datasheet.octopart.com:443/RC0603FR-071ML-Yageo-datasheet-137700087.pdf?src-supplier=Future+Electronics, ComponentLink13Description=https://datasheet.octopart.com:443/RC0603FR-071ML-Yageo-datasheet-27584510.pdf?src-supplier=Future+Electronics, ComponentLink13URL=https://datasheet.octopart.com:443/RC0603FR-071ML-Yageo-datasheet-27584510.pdf?src-supplier=Future+Electronics, ComponentLink14Description=https://datasheet.octopart.com:443/RC0603FR-071ML-Yageo-datasheet-15599030.pdf?src-supplier=Future+Electronics, ComponentLink14URL=https://datasheet.octopart.com:443/RC0603FR-071ML-Yageo-datasheet-15599030.pdf?src-supplier=Future+Electronics, ComponentLink15Description=https://datasheet.octopart.com:443/RC0603FR-071ML-Yageo-datasheet-12596169.pdf?src-supplier=Future+Electronics, ComponentLink15URL=https://datasheet.octopart.com:443/RC0603FR-071ML-Yageo-datasheet-12596169.pdf?src-supplier=Future+Electronics, ComponentLink16Description=https://datasheet.octopart.com:443/RC0603FR-071ML-Yageo-datasheet-8324193.pdf?src-supplier=Future+Electronics, ComponentLink16URL=https://datasheet.octopart.com:443/RC0603FR-071ML-Yageo-datasheet-8324193.pdf?src-supplier=Future+Electronics, ComponentLink17Description=https://datasheet.octopart.com/RC0603FR-071ML-Yageo-datasheet-73766026.pdf, ComponentLink17URL=https://datasheet.octopart.com/RC0603FR-071ML-Yageo-datasheet-73766026.pdf, ComponentLink18Description=https://datasheet.octopart.com:443/RC0603FR-071ML-Yageo-datasheet-30459151.pdf?src-supplier=Seeed+Studio, ComponentLink18URL=https://datasheet.octopart.com:443/RC0603FR-071ML-Yageo-datasheet-30459151.pdf?src-supplier=Seeed+Studio, ComponentLink19Description=https://datasheet.octopart.com:443/RC0603FR-071ML-Yageo-datasheet-118562.pdf?src-supplier=DigiKey, ComponentLink19URL=https://datasheet.octopart.com:443/RC0603FR-071ML-Yageo-datasheet-118562.pdf?src-supplier=DigiKey, ComponentLink20Description=https://datasheet.octopart.com:443/RC0603FR-071ML-Yageo-datasheet-503470.pdf?src-supplier=element14, ComponentLink20URL=https://datasheet.octopart.com:443/RC0603FR-071ML-Yageo-datasheet-503470.pdf?src-supplier=element14, ComponentLink21Description=http://sigma.octopart.com:80/conflict_mineral_statement/Yageo-company-3.pdf?src-supplier=Compliance+Statements, ComponentLink21URL=http://sigma.octopart.com:80/conflict_mineral_statement/Yageo-company-3.pdf?src-supplier=Compliance+Statements, ComponentLink22Description=http://sigma.octopart.com:80/rohs_statement/Yageo-company-2.pdf?src-supplier=Compliance+Statements, ComponentLink22URL=http://sigma.octopart.com:80/rohs_statement/Yageo-company-2.pdf?src-supplier=Compliance+Statements, Composition="Thick Film", Country of Origin="Mainland China, Taiwan", Depth=800µm, Diameter=10mm, Export Control Classification Number (ECCN) Code=EAR99, Harmonized Tariff Schedule (HTS) Code=8533.21.00.30, Height=450µm, Introduction Date=2004-10-04, Lead Free="Lead Free", Lead Pitch=5mm, Length=1.6mm, Lifecycle Status=Production, Manufacturer Part Number 1=RC0603FR-071ML, Military Standard=Not, Mounting Technology="Surface Mount", Number of Terminals=2, Packaging=Bulk, Pins=2, Pricing 1="1=0.1, 10=0.025, 25=0.0188, 50=0.015, 100=0.0122, 250=0.0094, 500=0.00782, 1000=0.00661 (USD)", Radiation Hardening=No, REACH SVHC=Unaffected, RoHS=Compliant, Schedule B="8533210045, 8533210045|8533210045|8533210045|8533210045|8533210045|8533210045|8533210045|8533210045|8533210045|8533210045|8533210045|8533210045|8533210045|8533210045|8533210045|8533210045|8533210045|8533210045|8533210045|8533210045|8533210045|8533210045|8533210045|85", Stock 1=1117479, Supplier 1=DigiKey, Termination=SMD/SMT, Voltage Rating (DC)=25V, Width=800µm